# Altium PCB Gandhvedhh.U.K.PcbDoc (part 1 of 2)
Units mil, origin at the board's own origin, x right, y up, seen from the top; angles counter-clockwise.
Board outline 3028 x 3031 mil, 2 copper layers (Top Layer, Bottom Layer); 133 components, 67 nets, 381 pads, 112 vias.
Unrouted connection lines stored in the file: 94.
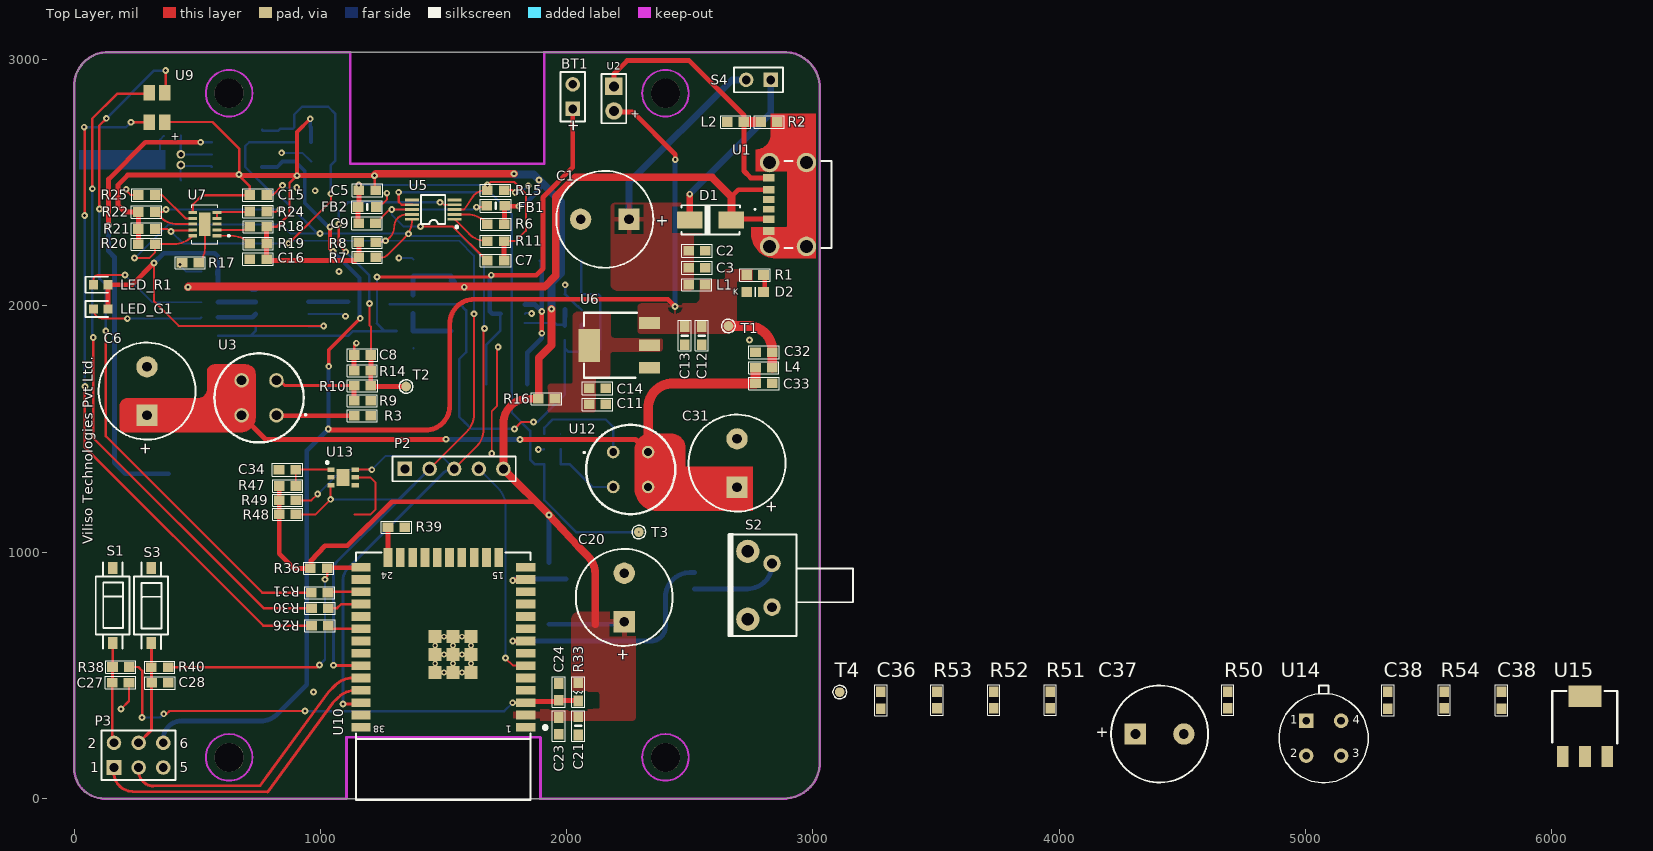
[diagram p0: Top Layer view]
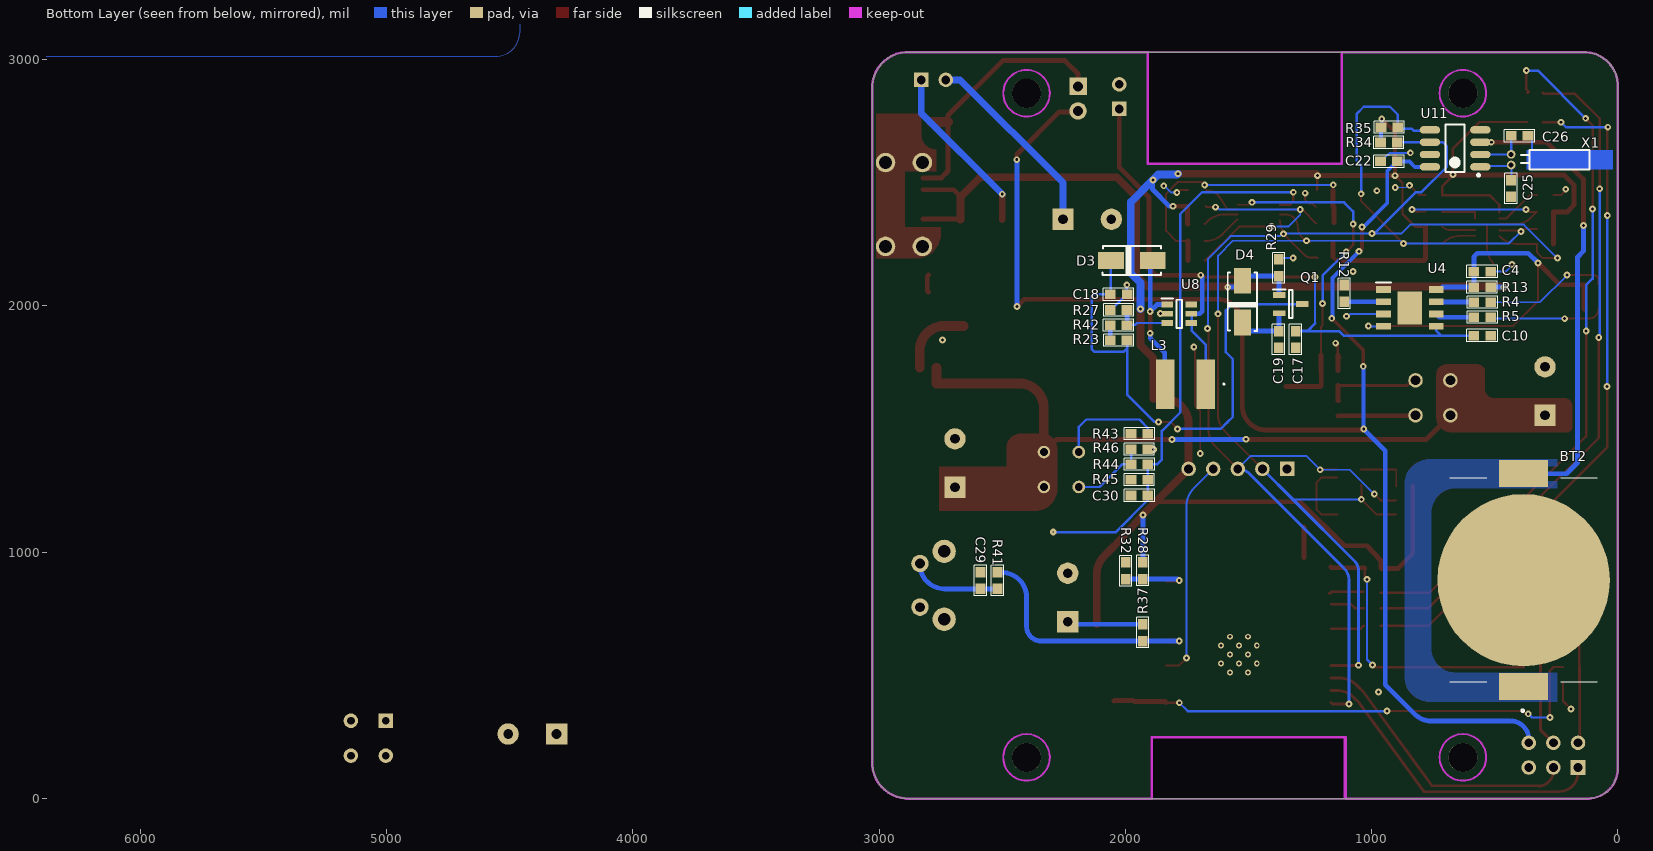
[diagram p1: Bottom Layer view, seen from below]

## Layer stack, top to bottom
Top Solder: solder mask 0.4, Solder Resist, Dk 3.5
Top Layer: signal copper 1.4
Dielectric 1: dielectric 12.6, FR-4, Dk 4.8
Bottom Layer: signal copper 1.4
Bottom Solder: solder mask 0.4, Solder Resist, Dk 3.5

## Board outline
2882.98,3030.97 cw(c2882.98,2885.98) 3027.97,2885.97 3027.97,145.97 cw(c2881.98,145.97) 2881.97,-0.03 122.97,-0.03 cw(c122.97,122.97) -0.03,122.97 -0.03,2892.97 cw(c137.97,2892.97) 137.97,3030.97
cut-out: 1110.97,-0.03 1110.97,248.97 1896.97,248.97 1896.97,-0.03
cut-out: 1121.71,3030.97 1909.11,3030.97 1909.11,2578.4 1121.71,2578.4

## Design rules (kind name [scope] priority, off if disabled: settings)
AssemblyTestpoint [All] p1: testpointundercomponent=FALSE minsize=40 maxsize=100 preferedsize=60 minholesize=0 maxholesize=40 preferedholesize=32.01 testpointgrid=0.98 usegrid=TRUE gridtolerance=0.01 allowsidetop=TRUE allowsidebottom=TRUE
Clearance Clearance_4 [All vs InComponent('X1')] p1: gap=5.91 ignorepadtopadclearanceinfootprint=FALSE
Clearance Clearance_3 [All vs InPolygon] p2: gap=19.68 ignorepadtopadclearanceinfootprint=FALSE
Clearance Clearance_2 [All vs InComponent('U1')] p3: gap=3.94 ignorepadtopadclearanceinfootprint=FALSE
Clearance Clearance_1 [All vs InComponent('U10')OR InComponent('U7')OR InComponent('U5')OR InComponent('U13')] p4: gap=7.87 ignorepadtopadclearanceinfootprint=FALSE
Clearance [All] p5: gap=8 ignorepadtopadclearanceinfootprint=FALSE
DiffPairsRouting [All] p1: maxlimit=10 minlimit=6 mostfreqgap=6 toplayer_minwidth=0.38 toplayer_maxwidth=0.38 toplayer_prefwidth=0.38 bottomlayer_minwidth=0.38 bottomlayer_maxwidth=0.38 bottomlayer_prefwidth=0.38 maxuncoupledlength=500
FabricationTestpoint [All] p1: side=3 testpointundercomponent=TRUE minsize=40 maxsize=100 preferedsize=60 minholesize=0 maxholesize=40 preferedholesize=32.01 testpointgrid=0.98 allowsidetop=TRUE allowsidebottom=TRUE usegrid=TRUE gridtolerance=0.01
HoleSize [All] p1: absolutevalues=TRUE maxlimit=393.7 minlimit=0.98 maxpercent=80.000 minpercent=20.000
HoleToHoleClearance [All] p1: gap=20 allowstackedmicrovias=TRUE
PolygonConnect [All] p1: thpad.connectstyle=Relief thpad.reliefconductorwidth=19.68 thpad.reliefentries=4 thpad.polygonreliefangle="90 Angle" thpad.airgapwidth=15 smdpad.connectstyle=Direct smdpad.reliefconductorwidth=10 smdpad.reliefentries=4 smdpad.polygonreliefangle="90 Angle" smdpad.airgapwidth=10 via.connectstyle=Relief via.reliefconductorwidth=10 via.reliefentries=4 via.polygonreliefangle="90 Angle" via.airgapwidth=15
RoutingVias [All] p1: holewidth=11.81 width=27.56 viastyle="Through Hole" minholewidth=3.94 minwidth=15.75 maxholewidth=11.81 maxwidth=27.56
SilkToSilkClearance [All] p1: silktosilkclearance=3.94
SolderMaskExpansion [All] p1: expansion=4 istentingtop=FALSE
Width [All] p1: maxlimit=78.74 minlimit=5 preferedwidth=7.87
24 further rules are at their usual default settings.

## Components (designator, comment, footprint, x,y, rotation, side; value= is the part's Value field where it differs from the comment)
BT1 "Battery" BAT-2 2024.97,2849.97 r90 top
BT2 "Battery" MPD_BK-912-TR 382.97,886.49 r90 bottom
C1 "470UF" "C16, C49, C58" 2155.17,2352.02 r180 top locked
C2 "10uF" C0603 2529.19,2224.07 r0 top
C3 "0.1UF" C0603 2529.19,2155.17 r0 top
C4 "10uF" C0603 550.84,2139.61 r0 bottom
C5 "1µF" C0603 1190.6,2470.13 r0 top
C6 "470uF/16V" "C16, C49, C58" 295.97,1654.4 r90 top locked
C7 "1µF" C0603 1712.26,2184.7 r0 top
C8 "0.1µF" C0603 1170.92,1800.84 r0 top
C9 "10µF" C0603 1189.97,2335.97 r180 top
C10 "10uF" C0603 550.84,1879.58 r0 bottom
C11 "10µF" C0603 2125.64,1600.62 r180 top
C12 "0.1µF" "0603 Capacitor" 2548.87,1879.58 r270 top
C13 "10µF" "0603 Capacitor" 2479.97,1879.58 r270 top
C14 "10µF" C0603 2125.64,1665.75 r0 top
C15 "0.1µF" C0603 747.69,2450.45 r0 top
C16 "10µF" C0603 747.69,2190.42 r0 top
C17 "22uF" C0603 1308.71,1863.67 r90 bottom
C18 "22uF" C0603 2027.22,2046.9 r0 bottom
C19 "0.1uF" C0603 1377.61,1863.67 r90 bottom
C20 "470UF" "C16, C49, C58" 2233.91,816.59 r90 top locked
C21 "0.1µF" "0603 Capacitor" 2046.9,294.94 r90 top
C22 "1µF" C0603 929.97,2586.97 r180 bottom
C23 "10µF" C0603 1968.16,294.94 r90 top
C24 "0.1µF" C0603 1968.16,432.9 r270 top
C25 "0.1µF" C0603 433.97,2476.74 r90 bottom
C26 "0.1µF" C0603 398.97,2690.97 r0 bottom
C27 "1nF" C0603 188.97,470.8 r180 top
C28 "1nF" C0603 348.97,469.8 r180 top
C29 "1nF" C0603 2588.24,885.49 r270 bottom
C30 "0.1µF" C0603 1942.97,1230.38 r180 bottom
C31 "470uF/16V" "C16, C49, C58" 2691.97,1361.97 r90 top locked
C32 "0.1µF" C0603 2801,1811.97 r0 top
C33 "0.1µF" C0603 2800.97,1685.62 r180 top
C34 "1µF" C0603 865.97,1334.97 r180 top
C36 "0.1µF" C0603 3275.97,398.97 r90 top
C37 "470uF/16V" "C16, C49, C58" 4407.97,261.97 r0 top
C38 "10µF" C0603 5795.97,398.97 r90 top
C38 "10µF" C0603 5334.97,398.97 r90 top
D1 "DIODE" D1 2584.3,2350.05 r180 top
D2 "LED_GREEN" "D2              L0603" 2765.41,2056.75 r180 top
D3 "SS34FA" D1 1974.07,2184.7 r0 bottom
D4 "B5819WS-TP" D1 1525.25,2017.38 r270 bottom
FB1 "FB 1uH" "0603 Capacitor" 1712.26,2406.55 r0 top
FB2 "FB 1uH" "0603 Capacitor" 1189.97,2401.97 r0 top
L1 "1uH" "L3, L4, L5, L6, L7" 2529.19,2086.27 r0 top
L2 "1uH" "L3, L4, L5, L6, L7" 2685.97,2746.97 r180 top
L3 "VLS6045EX-220M-CA" VLS6045 1755.56,1682.73 r0 bottom
L4 "1uH" "L3, L4, L5, L6, L7" 2800.97,1748.8 r180 top
LED_G1 "150060GS55040" LEDC1608X50N 107.93,1987.85 r0 top
LED_R1 "150060GS55040" LEDC1608X50N 107.93,2086.27 r0 top
P2 "Header 5" HDR1X5 1343.36,1338.24 r0 top
P3 "Header 3X2" HDR2X3 161.97,125.97 r0 top
Q1 "RQ5E030RPTL" SOT95P280X100-3N 1328.4,2007.53 r180 bottom
R1 "10K" R0603 2765.41,2125.64 r0 top
R2 "0E" R0603 2821.97,2746.97 r180 top
R3 "DNP" R0603 1170.92,1554 r0 top
R4 "1K" R0603 550.84,2015.21 r0 bottom
R5 "1K" R0603 550.84,1953.99 r0 bottom
R6 "10K" R0603 1712.26,2332.34 r180 top
R7 "10K" R0603 1190.6,2197.69 r0 top
R8 "10K" R0603 1190.6,2258.91 r0 top
R9 "1K" R0603 1170.92,1615.22 r0 top
R10 "1K" R0603 1170.92,1676.44 r180 top
R11 "10K" R0603 1712.26,2263.44 r0 top
R12 "10K" R0603 1111.86,2051.38 r90 bottom
R13 "470R" R0603 550.84,2076.43 r180 bottom
R14 "2K" R0603 1170.92,1737.67 r0 top
R15 "DNP" R0603 1712.26,2470.13 r0 top
R16 "0E" R0603 1918.95,1623.68 r0 top
R17 "DNP" R0603 472.1,2174.86 r0 top
R18 "4.7K" R0603 747.69,2322.49 r180 top
R19 "4.7K" R0603 747.69,2253.6 r180 top
R20 "4.7K" R0603 294.93,2251.43 r0 top
R21 "4.7K" R0603 294.93,2312.65 r0 top
R22 "100K" R0603 294.93,2381.55 r0 top
R23 "4.7K" R0603 2027.22,1861.28 r0 bottom
R24 "10K" R0603 747.69,2383.72 r0 top
R25 "10K" R0603 294.93,2450.45 r180 top
R26 "1.69K" R0603 997.97,701.97 r180 top
R27 "2.2K" R0603 2027.22,1983.73 r0 bottom
R28 "10K/ NTC" R0603 1928.79,924.86 r270 bottom
R29 "100K" R0603 1377.61,2155.17 r90 bottom
R30 "1.69K" R0603 997.97,772.97 r180 top
R31 "1.69K" R0603 996.97,835.97 r180 top
R32 "10K" R0603 1997.69,924.86 r90 bottom
R33 "10K" R_0603_W 2046.9,432.89 r270 top
R34 "10K/DNP/TX" R0603 929.97,2663.97 r180 bottom
R35 "10K/DNP/TX" R0603 927.97,2725.2 r180 bottom
R36 "10K" R0603 993.75,934.7 r0 top
R37 "10K" R0603 1928.79,673.42 r270 bottom
R38 "470E" R0603 189.97,533.97 r0 top
R39 "10K/DNP" R0603 1308.71,1102.02 r180 top
R40 "470E" R0603 347.97,532.97 r0 top
R41 "470E" R0603 2519.34,885.49 r90 bottom
R42 "12K" R0603 2027.22,1922.51 r180 bottom
R43 "DNP" R0603 1942.97,1480.78 r0 bottom
R44 "1K" R0603 1942.97,1356.97 r0 bottom
R45 "2K" R0603 1942.97,1294.97 r180 bottom
R46 "1K" R0603 1942.97,1418.78 r180 bottom
R47 "0R/DNP" R0603 866.97,1268.97 r180 top
R48 "10K/DNP" R0603 866.97,1153.97 r180 top
R49 "10K/DNP" R0603 866.97,1210.97 r180 top
R50 "0E" R0603 4684.97,399.97 r90 top
R51 "1K" R0603 3963.97,399.97 r90 top
R52 "1K" R0603 3733.97,399.97 r90 top
R53 "2K" R0603 3503.97,399.97 r90 top
R54 "0E" R0603 5563.97,399.97 r90 top
S1 "SW-PB" "S2, S3" 156.97,783.97 r90 top
S2 "SW-SPST" S1 2785.09,865.8 r270 top locked
S3 "SW-PB" "S2, S3" 313,783.44 r90 top
S4 "Header 2" HDR1X2 2828.97,2917.97 r180 top
T1 "TEST POINT" TP 2657.14,1918.95 r0 top
T2 "TEST POINT" TP 1348.08,1672.89 r0 top
T3 "TEST POINT" TP 2292.97,1081.97 r0 top
T4 "TEST POINT" TP 3108.97,431.97 r0 top
U1 "217175-0001" 2171750001 2940.27,2412.24 r90 top locked
U2 "RST_CON_BERG_2.54MM" U23 2191.97,2841.97 r0 top
U3 "TGS2602" TGS2602#1 750.97,1626.97 r0 top locked
U4 "TP4056" SOIC127P600X175-9N 844.62,1992.38 r180 bottom
U5 "ADS1115IDGSR-msop" "U19, U20" 1458.32,2391.39 r180 top locked
U6 "LM1117" "U1, U24              SOT-223" 2214.23,1840.21 r90 top locked
U7 "CCS811B-JOPR5KCT" *SON60P400X270X110-11N 531.16,2332.34 r180 top
U8 "MT3608" SOT95P280X145-6N 1781.16,1968.16 r180 bottom
U9 "RGB_LED" WL-SFCW_1206 335.97,2805.97 r90 top locked
U10 "ESP_32" "U20             ESP 32 - duplicate" 1499.66,634.11 r180 top locked
U11 "DS1307Z" "U6, U8                    SOIC-8N" 660.97,2639.97 r0 bottom
U12 "TGS2603" TGS2602#2 2259.97,1335.97 r180 top locked
U13 "SGP40-D-R4" SON80P244X244X95-7N 1091.97,1303.97 r0 top
U14 "TGS2603" U4 5073.97,244.97 r0 top
U15 "LM1117S-1.8" "U1, U24              SOT-223" 6134.97,292.97 r0 top
X1 "32.768kHz" XTAL 433.61,2594.1 r270 bottom

## Footprints (in the part's own frame and the unit in brackets; to place one, negate y for a bottom-side part, rotate by r counter-clockwise, add the part's x,y. Pads: shape width x height; smd on the part's side, far side on the other; paste and mask are expansions set on the pad)
"0603 Capacitor" [mil]
  rect 43x39 smd: 1(-37,0) 2(37,0)
  silkscreen extent -62,-26 62,26, body extent -31,-16 32,16, height 32
2171750001 [mm]
  rect 0.7x1.2 smd: A5(-0.5,3.03) B5(0.5,3.03)
  rect 0.76x1.2 smd: A9(1.52,3.03) B9(-1.52,3.03)
  rect 0.8x1.2 smd: A12(2.75,3.03) B12(-2.75,3.03)
  round 2.01 hole 1.34: MH1(-4.32,-0.85) MH2(4.32,-0.85) MH3(-4.32,2.95) MH4(4.32,2.95)
  silkscreen extent -4.47,-3.45 4.47,4.5, body extent -4.47,-3.36 4.47,3.54, height 3.23
*SON60P400X270X110-11N [mm]
  rect 0.91x0.32 smd: 1(-1.255,1.2) 2(-1.255,0.6) 3(-1.255,0) 4(-1.255,-0.6) 5(-1.255,-1.2) 6(1.255,-1.2) 7(1.255,-0.6) 8(1.255,0) 9(1.255,0.6) 10(1.255,1.2)
  rect 1.2x2.4 smd: 11(0,0)
  silkscreen extent -2.57,-2 1.35,2, body extent -1.35,-2 1.35,2, height 1.1
BAT-2 [mm] "Battery; 2 Leads"
  rect 1.5x1.5 hole 0.9: 1(-1.27,0)
  round 1.5 hole 0.9: 2(1.27,0)
  silkscreen extent -2.54,-1.27 2.54,1.27
"C16, C49, C58" [mm]
  rect 2.2x2.2 hole 1: 1(-2.5,0)
  round 2.2 hole 1: 2(2.5,0)
  silkscreen extent -5,-5 5,5
C0603 [mil]
  rect 43x39 smd: 1(-34.03,0) 2(34.03,0)
  silkscreen extent -62,-26 62,26, body extent -31,-16 31,16, height 12
D1 [mm]
  rect 2.65x1.75 smd: 1(2.15,0) 2(-2.15,0)
  silkscreen extent -3.02,-1.5 3,1.5, body extent -2.75,-1.4 2.75,1.4, height 2.6
"D2              L0603" [mil]
  rect 43x39 smd: 1(-34,0) 2(34,0)
  silkscreen extent 0,-20 0,20, body extent -32,-16 31,16, height 24
HDR1X2 [mm] "Connector; Header; 2 Position"
  rect 1.5x1.5 hole 0.9: 1(0,0)
  round 1.5 hole 0.9: 2(2.54,0)
  silkscreen extent -1.27,-1.27 3.81,1.27
HDR1X5 [mm] "Connector; Header; 5 Position"
  rect 1.5x1.5 hole 0.9: 1(0,0)
  round 1.5 hole 0.9: 2(2.54,0) 3(5.08,0) 4(7.62,0) 5(10.16,0)
  silkscreen extent -1.27,-1.27 11.43,1.27
HDR2X3 [mm] "Connector; Header; 3x2 Position"
  rect 1.5x1.5 hole 0.9: 1(0,0)
  round 1.5 hole 0.9: 2(0,2.54) 3(2.54,0) 4(2.54,2.54) 5(5.08,0) 6(5.08,2.54)
  silkscreen extent -1.27,-1.27 6.35,3.81
"L3, L4, L5, L6, L7" [mil] "R0603"
  rect 43x39 smd: 1(-34,0) 2(34,0)
  silkscreen extent -61,-25 61,25, body extent -33,-16 33,16, height 22
LEDC1608X50N [mm]
  rect 0.9x0.95 smd: 1(-0.75,0) 2(0.75,0)
  silkscreen extent -1.55,-0.82 0.75,0.82
MPD_BK-912-TR [mm]
  rect 2.79x5.08 smd: 1(-10.985,0) 1(10.985,0)
  round 17.78 smd: 2(0,0)
  silkscreen extent -13.59,-7.62 10.54,7.62, body extent -11.48,-7.67 11.38,7.74, height 4.3
R0603 [mil] "R0603"
  rect 43x39 smd: 1(-34,0) 2(34,0)
  silkscreen extent -62,-25 61,25, body extent -33,-16 33,16, height 22
R_0603_W [mil] "Chip Resistor, 2-Leads, Body 1.60x0.80mm, IPC Medium Density"
  rect 43x39 smd: 1(-37,0) 2(37,0)
  silkscreen extent -62,-26 62,26, body extent -30,-15 32,16, height 18
S1 [mm]
  round 1.8 hole 1: 1(-2.25,1.25) 2(2.25,1.25)
  round 2.4 hole 1.3: ""(-3.5,-1.25) ""(3.5,-1.25)
  silkscreen extent -5.38,-3.25 5.32,9.6
"S2, S3" [mm]
  rect 1.25x1 smd: 1(-3.875,0) 2(3.875,0)
  silkscreen extent -4.46,-1.75 4.45,1.75
SOIC127P600X175-9N [mm]
  rect 1.525x0.7 smd: 1(-2.712,1.905) 2(-2.712,0.635) 3(-2.712,-0.635) 4(-2.712,-1.905) 5(2.712,-1.905) 6(2.712,-0.635) 7(2.712,0.635) 8(2.712,1.905)
  rect 2.513x3.402 smd: 9(0,0)
  silkscreen extent -3.47,2.6 -1.95,2.6, body extent -3,-2.45 3,2.45, height 1.75
SON80P244X244X95-7N [mm]
  rect 0.75x0.45 smd: 1(-1.25,0.8) 2(-1.25,0) 3(-1.25,-0.8) 4(1.25,-0.8) 5(1.25,0) 6(1.25,0.8)
  rect 1.35x1.74 smd: 7(0,0)
  silkscreen extent -1.75,1.4 -1.5,1.65, body extent -1.27,-1.22 1.27,1.22, height 0.95
SOT95P280X100-3N [mm]
  rect 1.3x0.6 smd: 1(-1.2,0.95) 2(-1.2,-0.95) 3(1.2,0)
  silkscreen extent -1.85,-1.45 0.2,1.5, body extent -1.4,-1.45 1.4,1.45, height 1
SOT95P280X145-6N [mm]
  rect 1.2x0.6 smd: 1(-1.25,0.95) 2(-1.25,0) 3(-1.25,-0.95) 4(1.25,-0.95) 5(1.25,0) 6(1.25,0.95)
  silkscreen extent -1.85,-1.45 0.3,1.6, body extent -1.4,-1.45 1.4,1.45, height 1.45
TGS2602#1 [mm]
  round 1.5 hole 1: 1(1.8,-1.8) 2(1.8,1.8) 3(-1.8,1.8) 4(-1.8,-1.8)
  silkscreen extent -4.6,-4.6 4.85,4.6, body extent -4.6,-4.6 4.6,4.6, height 8
TGS2602#2 [mm]
  round 1.3 hole 0.8: 1(1.8,-1.8) 2(1.8,1.8) 3(-1.8,1.8) 4(-1.8,-1.8)
  silkscreen extent -4.6,-4.6 4.85,4.6, body extent -4.6,-4.6 4.6,4.6, height 8
TP [mm]
  round 1 smd paste-1 mask+0.102: 1(0,0)
  silkscreen extent -0.7,-0.7 0.7,0.7
"U1, U24              SOT-223" [mm]
  rect 1.2x2.2 smd: 1(-2.3,-3.1) 2(0,-3.1) 3(2.3,-3.1)
  rect 3.4x2.2 smd: 4(0,3.1)
  silkscreen extent -3.35,-1.77 3.35,3.65, body extent -3.26,-3.47 3.24,3.49, height 1.9
U4 [mm]
  rect 1.5x1.5 hole 0.8: 1(-1.8,1.8)
  round 1.5 hole 0.8: 2(-1.8,-1.8) 3(1.8,-1.8) 4(1.8,1.8)
  silkscreen extent -4.6,-4.6 4.6,5.43
"U6, U8                    SOIC-8N" [mil]
  oval 82.68x30 smd: 1(-102.36,75) 2(-102.36,25) 3(-102.36,-25) 4(-102.36,-75) 5(102.36,-75) 6(102.36,-25) 7(102.36,25) 8(102.36,75)
  silkscreen extent -100,-96 38,114, body extent -118,-96 118,96, height 67
"U19, U20" [mm]
  rect 1.45x0.3 smd mask+0.08: 1(-2.2,1) 2(-2.2,0.5) 3(-2.2,0) 4(-2.2,-0.5) 5(-2.2,-1) 6(2.2,-1) 7(2.2,-0.5) 8(2.2,0) 9(2.2,0.5) 10(2.2,1)
  silkscreen extent -2.55,-1.5 1.25,1.9
"U20             ESP 32 - duplicate" [mm]
  rect 2x0.9 smd: 1(-8.5,8.755) 2(-8.5,7.485) 3(-8.5,6.215) 4(-8.5,4.945) 5(-8.5,3.675) 6(-8.5,2.405) 7(-8.5,1.135) 8(-8.5,-0.135) 9(-8.5,-1.405) 10(-8.5,-2.675) 11(-8.5,-3.945) 12(-8.5,-5.215) 13(-8.5,-6.485) 14(-8.5,-7.755) 25(8.5,-7.755) 26(8.5,-6.485) 27(8.5,-5.215) 28(8.5,-3.945) 29(8.5,-2.675) 30(8.5,-1.405) 31(8.5,-0.135) 32(8.5,1.135) 33(8.5,2.405) 34(8.5,3.675) 35(8.5,4.945) 36(8.5,6.215) 37(8.5,7.485) 38(8.5,8.755)
  rect 0.9x2 smd: 15(-5.715,-8.755) 16(-4.445,-8.755) 17(-3.175,-8.755) 18(-1.905,-8.755) 19(-0.635,-8.755) 20(0.635,-8.755) 21(1.905,-8.755) 22(3.175,-8.755) 23(4.445,-8.755) 24(5.715,-8.755)
  rect 1.33x1.33 smd: 39(-2.85,3.115) 39(-2.85,-0.585) 39(-2.85,1.265) 39(-1,3.115) 39(-1,1.265) 39(-1,-0.585) 39(0.85,3.115) 39(0.85,1.265) 39(0.85,-0.585)
  silkscreen extent -10.6,-9.26 9,16.26, body extent -9.06,-9.29 9.01,16.25, height 3.2
U23 [mm]
  rect 1.8x1.8 hole 1.02: 1(0,1.27)
  round 1.8 hole 1.02: 2(0,-1.27)
  silkscreen extent -1.27,-2.54 1.27,2.54
VLS6045 [mm]
  rect 1.9x5.1 smd: 1(-2.1,0) 2(2.1,0)
  silkscreen extent -4,-0.05 -3.9,0.05
WL-SFCW_1206 [mm] "SMT Full-color Chip LED Waterclear, body 3.2x1.6mm"
  rect 1.6x1.2 smd: 1(-1.5,0.8) 2(-1.5,-0.8) 3(1.5,-0.8) 4(1.5,0.8)
  body extent -1.6,-0.8 1.6,0.8, height 0.7
XTAL [mm]
  round 0.9 hole 0.5: 1(0.55,0) 2(-0.55,0)
  silkscreen extent -1,1.02 1,8.09

## Part data
BT1 BT2: "Multicell Battery", LatestRevisionDate=17-Jul-2002, LatestRevisionNote="Re-released for DXP Platform.", PackageDescription="Battery; 2 Leads", PackageReference=BAT-2, Published=24-Mar-1999, Publisher="Altium Limited"
C1 C6 C20 C31 C37: library part CAP, "CAP ALUM 470UF 20% 50V RADIAL", Part Number=871-B41896E6477M000
C2 C3: library part "CAP NP", "CAP CER 22UF 10V X5R 0603", Part Number=GRM188R61A226ME15D
C4 C10 C17 C18 C19: library part CAP_C_0.1µF/16V, "CAP CER SMD 0.1µF/16V", Capacitance=1nF, MANUFACTURER="Murata Electronics North America", Manufacturer Part Number=GRM155R61H104KE19D, Operating Temperature="-55°C ~ 85°C", Ratings=-, Supplier Part Number 1=490-11917-1-ND, Temperature Coefficient=X5R, Tolerance=±10%, Voltage - Rated=16V, Applications="General Purpose", Category=Capacitors, ComponentLink1Description=http://www.murata.com/~/media/webrenewal/support/library/catalog/products/capacitor/mlcc/c02e.ashx, ComponentLink1URL=http://www.murata.com/~/media/webrenewal/support/library/catalog/products/capacitor/mlcc/c02e.ashx, Features=-, Height - Seated (Max)=-, Lead Spacing=-, Lead Style=-, Mounting Type="Surface Mount, MLCC", Packaging="Cut Tape (CT)", Part Status=Active, Pricing 1="1=0.1, 10=0.062, 25=0.0456, 50=0.034, 100=0.0278, 250=0.02328, 500=0.01988, 1000=0.01562, 5000=0.01307 (USD)", ROHS="RoHS Compliant", Size / Dimension="0.039\" L x 0.020\" W (1.00mm x 0.50mm)", Stock 1=958509, Supplier 1=Digi-Key, Thickness (Max)="0.022\" (0.55mm)"
C5 C8 C21 C24 C27 C28 C29 C30 C32 C33 C36: library part CAP_C_0.1µF/16V, "CAP CER SMD 0.1µF/16V", MANUFACTURER="Murata Electronics North America", Manufacturer Part Number=GRM155R61H104KE19D, Operating Temperature="-55°C ~ 85°C", Package / Case="0402 (1005 Metric)", Ratings=-, Supplier Part Number 1=490-11917-1-ND, Temperature Coefficient=X5R, Tolerance=±10%, Voltage - Rated=16V, Applications="General Purpose", Category=Capacitors, ComponentLink1Description=http://www.murata.com/~/media/webrenewal/support/library/catalog/products/capacitor/mlcc/c02e.ashx, ComponentLink1URL=http://www.murata.com/~/media/webrenewal/support/library/catalog/products/capacitor/mlcc/c02e.ashx, Features=-, Height - Seated (Max)=-, Lead Spacing=-, Lead Style=-, Mounting Type="Surface Mount, MLCC", Packaging="Cut Tape (CT)", Part Status=Active, Pricing 1="1=0.1, 10=0.062, 25=0.0456, 50=0.034, 100=0.0278, 250=0.02328, 500=0.01988, 1000=0.01562, 5000=0.01307 (USD)", ROHS="RoHS Compliant", Size / Dimension="0.039\" L x 0.020\" W (1.00mm x 0.50mm)", Stock 1=958509, Supplier 1=Digi-Key, Thickness (Max)="0.022\" (0.55mm)"
  C5: Capacitance=1µF
  C8 C21 C24 C30 C32 C33 C36: Capacitance=0.1µF
  C27 C28 C29: Capacitance=1nF
C7 C12 C15 C22 C25 C26 C34: library part CAP_C_0.1µF/50V, "CAP CER SMD 0.1µF/50V", MANUFACTURER=Yageo, Manufacturer Part Number=CC0805ZRY5V9BB104, Operating Temperature="-30°C ~ 85°C", Package / Case="0805 (2012 Metric)", Ratings=-, Supplier Part Number 1=311-1361-1-ND, Temperature Coefficient="Y5V (F)", Tolerance="-20%, +80%", Voltage - Rated=50V, Applications="General Purpose", Category=Capacitors, ComponentLink1Description=http://www.yageo.com/documents/recent/UPY-GPHC_Y5V_6.3V-to-50V_8.pdf, ComponentLink1URL=http://www.yageo.com/documents/recent/UPY-GPHC_Y5V_6.3V-to-50V_8.pdf, Failure Rate=-, Features=-, Height - Seated (Max)=-, Lead Spacing=-, Lead Style=-, Mounting Type="Surface Mount, MLCC", Packaging="Cut Tape (CT)", Part Status=Active, Pricing 1="1=0.1, 10=0.036, 25=0.0264, 50=0.0198, 100=0.0162, 250=0.01352, 500=0.01156, 1000=0.00908 (USD)", ROHS="RoHS Compliant", Size / Dimension="0.079\" L x 0.049\" W (2.00mm x 1.25mm)", Stock 1=934185, Supplier 1=Digi-Key, Thickness (Max)="0.024\" (0.60mm)"
  C7 C22 C34: Capacitance=1µF
  C12 C15 C25 C26: Capacitance=0.1µF
C9 C11 C13 C14 C38 C38: library part CAP_C_10µF/35V, "CAP CER SMD 10µF/35V", MANUFACTURER="Taiyo Yuden", Manufacturer Part Number=GMK316AB7106KL-TR, Operating Temperature="-55°C ~ 125°C", Package / Case="1206 (3216 Metric)", Ratings=-, Supplier Part Number 1=587-3007-1-ND, Temperature Coefficient=X7R, Tolerance=±10%, Voltage - Rated=35V, Applications="General Purpose", Capacitance=10µF, Category=Capacitors, ComponentLink1Description=http://www.yuden.co.jp/productdata/catalog/en/mlcc06_e.pdf, ComponentLink1URL=http://www.yuden.co.jp/productdata/catalog/en/mlcc06_e.pdf, Features=-, Height - Seated (Max)=-, Lead Spacing=-, Lead Style=-, Mounting Type="Surface Mount, MLCC", Packaging="Cut Tape (CT)", Part Status=Active, Pricing 1="1=0.51, 10=0.362, 25=0.3092, 50=0.274, 100=0.2387, 250=0.20328, 500=0.17678, 1000=0.15026 (USD)", ROHS="RoHS Compliant", Size / Dimension="0.126\" L x 0.063\" W (3.20mm x 1.60mm)", Stock 1=533940, Supplier 1=Digi-Key, Thickness (Max)="0.071\" (1.80mm)"
C16 C23: library part CAP_C_10µF/10V, "CAP CER SMD 10µF/10V", MANUFACTURER=Yageo, Manufacturer Part Number=CC0805ZKY5V6BB106, Operating Temperature="-30°C ~ 85°C", Package / Case="0805 (2012 Metric)", Ratings=-, Supplier Part Number 1=311-1355-1-ND, Temperature Coefficient="Y5V (F)", Tolerance="-20%, +80%", Voltage - Rated=10V, Applications="General Purpose", Capacitance=10µF, Category=Capacitors, ComponentLink1Description=http://www.yageo.com/documents/recent/UPY-GPHC_Y5V_6.3V-to-50V_8.pdf, ComponentLink1URL=http://www.yageo.com/documents/recent/UPY-GPHC_Y5V_6.3V-to-50V_8.pdf, Failure Rate=-, Features=-, Height - Seated (Max)=-, Lead Spacing=-, Lead Style=-, Mounting Type="Surface Mount, MLCC", Packaging="Cut Tape (CT)", Part Status=Active, Pricing 1="1=0.18, 10=0.131, 25=0.0956, 50=0.0742, 100=0.0615, 250=0.05088, 500=0.04312, 1000=0.03569 (USD)", ROHS="RoHS Compliant", Size / Dimension="0.079\" L x 0.049\" W (2.00mm x 1.25mm)", Stock 1=595702, Supplier 1=Digi-Key, Thickness (Max)="0.049\" (1.25mm)"
D1: "DIODE GEN PURP 1KV 1A DO214AC", Part Number=641-1018-2-ND
D2: library part LED, "LED GREEN CLEAR THIN 0603 SMD", Distributor Part Number=160-1443-1-ND, Manufacturer Part Number=160-1443-2-ND, PACKAGE=0603, Supplier Part Number 1=LTL-1CHG-BAG, Part Number=160-1443-2-ND, Supplier 1="Future Electronics", Type=Diode
D3: "Schottky Diode", Manufacturer_Name="ON Semiconductor", Mouser Part Number=512-SS34FA, Arrow Part Number=SS34FA, Arrow Price/Stock=https://www.arrow.com/en/products/ss34fa/on-semiconductor?region=nac, Datasheet Link=http://www.onsemi.com/pub/Collateral/SS36FA-D.pdf, Height=1.43mm, Manufacturer_Part_Number=SS34FA, Mouser Price/Stock=https://www.mouser.co.uk/ProductDetail/ON-Semiconductor-Fairchild/SS34FA?qs=R26iFe%2FkX%2FK1QUwZdCmBBw%3D%3D
D4: "Diode", Manufacturer_Name="Micro Commercial Components (MCC)", Mouser Part Number=833-B5819WS-TP, Arrow Part Number=B5819WS-TP, Arrow Price/Stock=https://www.arrow.com/en/products/b5819ws-tp/micro-commercial-components?region=asia, Datasheet Link=https://www.arrow.com/en/products/b5819ws-tp/micro-commercial-components, Height=1.15mm, Manufacturer_Part_Number=B5819WS-TP, Mouser Price/Stock=https://www.mouser.co.uk/ProductDetail/Micro-Commercial-Components-MCC/B5819WS-TP?qs=SdqRYZZ9IxBOLbXcW6zYBA%3D%3D
FB1 FB2: library part INDUCTOR, "FILTER CHIP 120 OHM 3A 0603", Distributor Part Number=MMZ2012Y152B, PACKAGE=0603, Manufacturer Part Number=MMZ2012Y152B, Part Number=MMZ2012Y152B, Type=Ferrite
L1 L2 L4: library part INDUCTOR, "FERRITE BEAD 120 OHM 0603 1LN", Part Number=490-3996-1-ND, Supplier Part Number 1=BLM18SG121TN1D, Supplier 1=Arrow
L3: "Inductor", Manufacturer_Name=TDK, Mouser Part Number=810-VLS6045EX220MCA, Arrow Part Number=VLS6045EX-220M-CA, Arrow Price/Stock=https://www.arrow.com/en/products/vls6045ex-220m-ca/tdk, Datasheet Link=https://product.tdk.com/system/files/dam/doc/product/inductor/inductor/smd/catalog/inductor_automotive_power_vls6045ex-ca_en.pdf, Manufacturer_Part_Number=VLS6045EX-220M-CA, Mouser Price/Stock=https://www.mouser.com/Search/Refine.aspx?Keyword=810-VLS6045EX220MCA
LED_G1 LED_R1: "LED", Manufacturer_Name="Wurth Elektronik", Mouser Part Number=710-150060GS55040, Datasheet Link=https://katalog.we-online.de/led/datasheet/150060GS55040.pdf, Height=0.5mm, Manufacturer_Part_Number=150060GS55040, Mouser Price/Stock=https://www.mouser.co.uk/ProductDetail/Wurth-Elektronik/150060GS55040?qs=fAHHVMwC%252Bbhr5Aln2oA6Nw%3D%3D
P2: "Header, 5-Pin", LatestRevisionDate=17-Jul-2002, LatestRevisionNote="Re-released for DXP Platform.", Publisher="Altium Limited"
P3: "Header, 3-Pin, Dual row", LatestRevisionDate=17-Jul-2002, LatestRevisionNote="Re-released for DXP Platform.", Publisher="Altium Limited"
Q1: "MOSFET (P-Channel)", Manufacturer_Name="ROHM Semiconductor", Mouser Part Number=755-RQ5E030RPTL, Datasheet Link=https://www.mouser.com/datasheet/2/348/rq5e030rp-e-1596311.pdf, Height=1mm, Manufacturer_Part_Number=RQ5E030RPTL, Mouser Price/Stock=https://www.mouser.com/Search/Refine.aspx?Keyword=755-RQ5E030RPTL
R1 R10 R44 R52: library part R, "RES SMD 1K OHM 5% 1/10W 0603", PACKAGE=0603, Part Number=311-1.0KGRTR-ND, Type=Resistor
R2 R4 R5 R12 R13 R23 R27 R29 R42: library part R, "RES SMD 4.7K OHM 1% 1/16W 0603", Distributor Part Number=1276-3466-2-ND, MANUFACTURER=Samsung, PACKAGE=0603, Part Number=P4.7KDBCT-ND, Rating=1/16W, Tolerance=1%, Distributor=Digikey, Manufacturer Part Number=1276-3466-2-ND, Type=Resistor
R3 R15 R43 R50: library part R, PACKAGE=0603, Type=Resistor
R6 R7 R8 R11: library part R, "RES SMD 4.7K OHM 1% 1/16W 0603", Distributor Part Number=1276-3466-2-ND, MANUFACTURER=Samsung, PACKAGE=0603, Part Number=311-10KGRTR-ND, Rating=1/16W, Tolerance=1%, Distributor=Digikey, Manufacturer Part Number=1276-3466-2-ND, Type=Resistor
R9 R46 R51: library part R, "RES SMD 1K OHM 5% 1/10W 0603", Distributor Part Number=1276-3466-2-ND, MANUFACTURER=Samsung, PACKAGE=0603, Part Number=311-1.0KGRTR-ND, Rating=1/16W, Tolerance=1%, Distributor=Digikey, Manufacturer Part Number=1276-3466-2-ND, Type=Resistor
R14 R45 R53: library part R, "RES SMD 2K OHM 1% 1/10W 0603", PACKAGE=0603, Part Number=YAG1297CT-ND, Type=Resistor
R16 R38 R40 R41 R54: library part R, "RES SMD 470 OHM 1% 1/10W 0603", PACKAGE=0603, Part Number=311-470HRCT-ND, Type=Resistor
R17: library part R
R18 R19 R20 R21: library part R, "P4.7KDBTR-ND", Part Number=P4.7KDBDKR-ND
R22: library part R, "RES SMD 100K OHM 0.1% 1/10W 0603", Part Number=YAG1235TR-ND
R24: library part R, Part Number=594-NTCS402E3103JL1T
R25: library part R, "RES SMD 4.7K OHM 1% 1/16W 0603", Part Number=311-10KGRTR-ND
R26 R30 R31 R32 R33 R34 R35 R36 R37 R39 R47 R48 R49: library part R, "RES SMD 4.7K OHM 1% 1/16W 0603", PACKAGE=0603, Part Number=311-10KGRTR-ND, Type=Resistor
R28: library part R, "THERMISTOR NTC 10KOHM 3380K 0603", PACKAGE=0603, Part Number=490-16279-2-ND, Type=Resistor
S1 S3: "Switch", LatestRevisionDate=17-Jul-2002, LatestRevisionNote="Re-released for DXP Platform.", PackageDescription="Switch; 2 Leads", PackageReference=SPST-2, Published=24-Mar-1999, Publisher="Altium Limited"
S2: "SWITCH TACTILE SPST-NO 0.05A 12V", Part Number=TL1105SF160Q, LatestRevisionDate=17-Jul-2002, LatestRevisionNote="Re-released for DXP Platform.", PackageDescription="Switch; 2 Leads", PackageReference=SPST-2, Published=24-Mar-1999, Publisher="Altium Limited"
S4: "Header, 2-Pin", LatestRevisionDate=17-Jul-2002, LatestRevisionNote="Re-released for DXP Platform.", Publisher="Altium Limited"
T1 T2 T3 T4: library part Test_P
U1: "Connector", Manufacturer_Name=Molex, Mouser Part Number=538-217175-0001, Datasheet Link=https://www.molex.com/pdm_docs/sd/2171750001_sd.pdf, Height=3.46mm, Manufacturer_Part_Number=217175-0001, Mouser Price/Stock=https://www.mouser.co.uk/ProductDetail/Molex/217175-0001?qs=DRkmTr78QARWJMiqNnldSg%3D%3D
U2: library part CON_AC_1, "CONN HEADER VERT 2POS 2.54MM", Part Number=609-4434-ND, Supplier Part Number 1=62K8865, Supplier 1=Newark
U3: library part TGS2602_1, Part Number=TGS2602
U4: "Connector", Manufacturer_Name="NanJing Top Power", Datasheet Link=https://dlnmh9ip6v2uc.cloudfront.net/datasheets/Prototyping/TP4056.pdf, Height=1.75mm, Manufacturer_Part_Number=TP4056
U5: library part ADS1115, "IC ADC 16BIT SIGMA-DELTA 10VSSOP", Part Number=595-ADS1115IDGST
U6: library part TLV70033DDCT, "3.3V LDO", Current - Limit (Min)=220mA, Current - Output=200mA, MANUFACTURER="Texas Instruments", Operating Temperature="-40°C ~ 125°C", Package / Case="SOT-23-5 Thin, TSOT-23-5", Supplier Device Package=SOT-23-5, Supplier Part Number 1=LM1117IMP-3.3/NOPBCT-ND, Voltage - Dropout (Typical)=-, Voltage - Input="Up to 5.5V", Voltage - Output=3.3V, Category="Integrated Circuits (ICs)", ComponentLink1Description=http://www.ti.com/lit/ds/slvsa00e/slvsa00e.pdf, ComponentLink1URL=http://www.ti.com/lit/ds/slvsa00e/slvsa00e.pdf, Manufacturer Part Number=LM1117, Mounting Type="Surface Mount", Packaging="Cut Tape (CT)", Part Status=Active, Pricing 1="1=0.53, 10=0.452, 100=0.3374 (USD)", Regulator Topology="Positive Fixed", ROHS="RoHS Compliant", Stock 1=5021, Supplier 1=Digi-Key
U7: library part CCS811B-JOPR5KCT_3, "CCS811B-JOPR5K LGA10 LF T&R", Part Number=CCS811B-JOPR5KCT-ND
U8: "Undefined or Miscellaneous", Manufacturer_Name=Aerosemi, Datasheet Link=https://www.olimex.com/Products/Breadboarding/BB-PWR-3608/resources/MT3608.pdf, Height=1.45mm, Manufacturer_Part_Number=MT3608
U9: library part RGB_LED_PTH_0, Part Number=754-1492-ND
U10: library part ESP32_SMD_1, "WIFI MODULE 128MBITS SPI FLASH", Part Number=356-ES32WROOM32D16MB
U11: library part MP1584_SOIC_0, "IC REG BUCK ADJUSTABLE 3A 8SOIC", Part Number=1589-1533-1-ND
U12 U14: library part TGS2602_1, Part Number=TGS2602
U13: "Integrated Circuit", Manufacturer_Name=Sensirion, Mouser Part Number=403-SGP40-D-R4, Arrow Part Number=SGP40-D-R4, Arrow Price/Stock=https://www.arrow.com/en/products/sgp40-d-r4/sensirion-ag?region=europe, Datasheet Link=https://www.mouser.com/datasheet/2/682/Sensirion_Gas_Sensors_SGP40_Datasheet-1888696.pdf, Height=0.95mm, Manufacturer_Part_Number=SGP40-D-R4, Mouser Price/Stock=https://www.mouser.co.uk/ProductDetail/Sensirion/SGP40-D-R4?qs=yqaQSyyJnNgaRqiZfsbS1Q%3D%3D
U15: library part TLV70033DDCT, "3.3V LDO", Current - Limit (Min)=220mA, Current - Output=200mA, MANUFACTURER="Texas Instruments", Manufacturer Part Number=LM1117, Operating Temperature="-40°C ~ 125°C", Package / Case="SOT-23-5 Thin, TSOT-23-5", Supplier Device Package=SOT-23-5, Supplier Part Number 1=LM1117IMP-3.3/NOPBCT-ND, Voltage - Dropout (Typical)=-, Voltage - Input="Up to 5.5V", Voltage - Output=3.3V, Category="Integrated Circuits (ICs)", ComponentLink1Description=http://www.ti.com/lit/ds/slvsa00e/slvsa00e.pdf, ComponentLink1URL=http://www.ti.com/lit/ds/slvsa00e/slvsa00e.pdf, Mounting Type="Surface Mount", Packaging="Cut Tape (CT)", Part Status=Active, Pricing 1="1=0.53, 10=0.452, 100=0.3374 (USD)", Regulator Topology="Positive Fixed", ROHS="RoHS Compliant", Stock 1=5021, Supplier 1=Digi-Key
X1: library part XTAL_2-pin, "XTAL SMD 3215, 32.768kHz, Cl=9pF, Total Tol: ±50ppm", Part Number=XTAL_SMD3215_32.768kHz_9pF_General, Artikkelnr Noca=N.A., Artikkelnr Simpro=N.A., Footprint Doc=XTAL_3215, LatestRevisionDate=2016-08-19, Note="XTAL SMD 32.768kHz", Pin Count=2, Published=2016-08-19, Publisher="Nordic Semiconductor"

## Free pads (board coordinates)
  round 118.11 hole 118.11 unplated: 34(629.58,2863.83) 35(2401.23,2863.83) 36(629.58,166.98) 37(2401.23,166.98)

## Via types
v1: diameter 27.56, hole 11.81, Top Layer to Bottom Layer, tented both sides, 99 vias
v2: diameter 23.62, hole 11.81, Top Layer to Bottom Layer, 12 vias
v3: diameter 27.56, hole 0, Top Layer to Bottom Layer, tented both sides, 1 vias

## Nets (pads, with @x,y where several pads share a name; then routed paths per layer and width w, separated by ;. In a path a pad name is that pad's centre, name@x,y a point inside that pad or via, vN(x,y) a via of type N, cw(c..) or ccw(c..) an arc to the next point about the centre after c; other vN are vias at no path point)
1V8: R47.2 R54.1
3V3: C5.2 C15.1 C16.2 C20.1 C21.2 C23.2 FB1.2 P2.5 R6.1 R7.1 R8.1 R16.1 R18.1 R19.1 R20.1 R21.1 R22.1 R28.1 R33.1 R34.1 R35.1 R36.1 R37.1 R48.2 R49.2 U7.6 U9.2 U10.2 U13.5 | length 8901.4
  Top Layer w7.87: U7.6@481.75,2379.58 U7.6@481.94,2379.78 ; 1138,1153.97 1139,1152.97 1203.18,1152.97 1224.43,1174.22 1224.43,1282.51 1202.97,1303.97 U13.5@1141.19,1303.97 ; R7.1@1143.62,2184.7 R7.1@1156.6,2197.69 ; C5.2@1220.13,2474.63 C5.2@1224.63,2470.13 ; R16.1@1884.95,1623.67 R16.1@1886.95,1623.67
  Top Layer w9.84: U9.2@367.47,2746.92 369.92,2746.92 369.97,2746.97 561.97,2746.97 669.97,2638.97 v1(669.97,2533.97) 669.97,2529.4 v1@669.76,2529.19
  Top Layer w10: U7.6@481.94,2379.78 481.94,2411.08 521.31,2450.45 C15.1@713.66,2450.45 713.66,2485.29 v1@669.76,2529.19 ; R18.1@781.69,2322.49 823.49,2322.49 874.74,2373.74 874.74,2498.75 v1(905.17,2529.19) ; C5.2@1220.13,2474.63 v1(1220.13,2529.19)
  Top Layer w15: v1(905.17,2529.19) 905.17,2706.17 v1(958.97,2759.97)
  Top Layer w19.68: R20.1@260.93,2251.43 R21.1@260.93,2312.65 R22.1@260.93,2381.55 206.01,2381.55 178.51,2409.05 178.51,2492.51 217.47,2531.47 v1@667.47,2531.47 ; v1@669.97,2529.19 v1(905.17,2529.19) 906.42,2530.44 1218.88,2530.44 v1(1220.13,2529.19) ; R19.1@781.69,2253.6 R18.1@781.69,2322.49 ; R19.1@781.69,2253.6 781.7,2190.43 787.44,2184.7 R7.1@1143.62,2184.7 ; 832.97,1268.97 R49.2@832.97,1210.97 R48.2@832.97,1153.97 832.97,993.63 891.91,934.7 R36.1@959.75,934.7 ; R36.1@961.75,936.7 961.75,966.08 1018.87,1026.1 1109.75,1026.1 1290.97,1205.33 1874.7,1205.33 v1(1928.79,1151.23) ; R7.1@1156.6,2197.69 R8.1@1156.6,2258.91 ; R6.1@1746.26,2332.34 1747.76,2333.84 1747.76,2405.05 v1(1806.87,2405.05)
  Top Layer w31.5: v1@1218.88,2530.44 1225.42,2536.97 v1(1785.97,2536.97) ; R16.1@1884.95,1623.67 1843.36,1623.67 ccw(c1843.36,1523.68) 1743.36,1523.88 P2.5@1743.36,1338.24 v1@1929.58,1152.02 ; R16.1@1886.95,1623.67 1886.95,1788.53 1938.64,1840.21 v1(1938.64,1987.85) ; v1(1928.79,1151.23) 2046.9,1023.28 2086.51,983.67 cw(c2015.8,912.96) 2115.8,912.96 2115.8,708.32
  Bottom Layer w9.84: R34.1@961.98,2665.97 R34.1@963.98,2663.97
  Bottom Layer w15: v1(958.97,2759.97) 958.97,2728.2 R35.1@961.98,2725.2 R34.1@961.98,2665.97
  Bottom Layer w19.68: v1(1806.87,2405.05) 1821.37,2405.05 1889.44,2473.11 1889.44,2510.51 v1(1887.97,2511.97) ; R37.1@1928.79,707.42 2223.17,707.42 C20.1@2233.91,718.16 ; R28.1@1928.79,958.86 v1(1928.79,1151.23)
  Bottom Layer w31.5: v1(1785.97,2536.97) 1789.17,2533.77 1866.17,2533.77 v1(1887.97,2511.97) 1978.01,2421.94 1978.01,2133.23 1938.64,2093.86 v1(1938.64,1987.85)
5P0_RAW: D1.2 D4.2 Q1.1 R13.2 R29.1 U1.A9 U1.B9 | length 3410.2
  Top Layer w9.84: D1.2@2668.95,2350.05 D1.2@2671.3,2352.4
  Top Layer w20: 2668.95,2444 2697.04,2472.09 U1.A9@2820.97,2472.09 ; D1.2@2671.3,2352.4 U1.B9@2820.97,2352.4
  Top Layer w31.5: v1(462.26,2076.43) 464.43,2078.6 1910.6,2078.6 1955.97,2123.97 1955.97,2443.54 2035.41,2522.97 2589.97,2522.97 2668.95,2444 D1.2@2668.95,2350.05
  Bottom Layer w7.87: D4.2@1525.25,2102.02 D4.2@1550.84,2076.43
  Bottom Layer w19.68: v1(462.26,2076.43) R13.2@516.84,2076.43 ; Q1.1@1375.64,2044.93 1376.63,2045.92 1376.63,2120.19 R29.1@1377.61,2121.17 D4.2@1521.85,2121.17 ; D4.2@1531.69,2121.17 D4.2@1521.85,2121.17 ; D4.2@1544.94,2098.08 1533.12,2109.9 D4.2@1521.85,2121.17 ; D4.2@1550.84,2076.43 v1(1584.3,2076.43)
5VCC: C12.1 C13.1 C22.2 C32.2 C38.1@5795.97,364.95 L1.2 L4.1 P3.6 R1.1 T1.1 U2.2 U6.3 U11.8 U15.3 | length 6281.6
  Top Layer w9.84: U2.2@2191.97,2791.98 U2.2@2195.97,2787.98
  Top Layer w15.75: v1(1033.97,1754.97) 1033.97,1821.97 v1(1161.97,1949.97) ; v1(1038.97,2321.29) 1038.97,2233.97 v1(1050.97,2221.97)
  Top Layer w19.68: v1(1031.97,1499.97) 1036.23,1495.72 1426.82,1495.72 ccw(c1426.82,1594.15) 1525.25,1594.15 1525.25,1927.22 cw(c1625.25,1927.22) 1625.25,2027.22 2411.08,2027.22 v1(2440.6,1997.69)
  Top Layer w20: U2.2@2195.97,2787.98 2267.97,2787.98 2440.97,2614.97 v1(2440.97,2593.97)
  Top Layer w39.37: T1.1@2657.14,1918.95 2735.03,1918.95 cw(c2735.03,1818.95) 2835.03,1818.95 C32.2@2835.03,1811.97 2835.03,1748.8 L4.1@2834.97,1748.8
  Bottom Layer w9.84: C22.2@895.95,2586.98 C22.2@897.95,2586.98 ; v1(1031.97,1499.97) v1@1032.97,1500.97 ; v1@1032.97,1753.97 v1(1033.97,1754.97) ; v1@2440.6,2593.6 v1(2440.97,2593.97)
  Bottom Layer w15.75: U11.8@763.34,2564.98 824.98,2564.98 846.98,2586.98 C22.2@895.95,2586.98 ; C22.2@897.95,2586.98 936.67,2548.26 936.67,2542.28 936.67,2418.28 1033.66,2321.29 v1(1038.97,2321.29) ; v1@1032.97,1500.97 v1@1032.97,1753.97 ; v1(1050.97,2221.97) 1159.48,2113.47 1159.48,1952.47 v1(1161.97,1949.97)
  Bottom Layer w19.68: P3.6@361.97,225.97 361.97,240.97 cw(c435.62,240.97) 435.62,314.62 757.53,314.62 ccw(c757.53,410.19) 825.09,342.59 944.54,462.04 944.54,1412.54 v1(1031.97,1499.97)
  Bottom Layer w20: v1(2440.6,1997.69) v1@2440.6,2593.6
5VCC_D: C6.1 C31.1 C33.2 C37.1 L4.2 U3.3 U3.4 U12.3 U12.4 U14.3 U14.4 | length 2448.6
  Top Layer w9.84: v1@1508.97,1457.97 v1(1509.97,1458.97)
  Top Layer w20: U3.4@680.11,1556.11 778.24,1457.97 v1@1508.97,1457.97 ; v1(1810.97,1457.97) 2279.71,1457.97 U12.4@2330.84,1406.84
  Top Layer w39.37: U12.4@2330.84,1406.84 2330.84,1585.62 cw(c2430.84,1585.62) 2430.84,1685.62 C33.2@2766.95,1685.62 L4.2@2766.97,1748.8
  Bottom Layer w9.84: v1(1509.97,1458.97) v1@1510.47,1458.47 ; v1@1810.47,1458.47 v1(1810.97,1457.97)
  Bottom Layer w20: v1@1510.47,1458.47 v1@1810.47,1458.47
ADC_T: C8.2 R10.1 R14.2 T2.1 U5.4 | length 1395.9
  Top Layer w7.87: v1(1198.97,2009.97) 1198.97,1921.92 1204.95,1915.95 C8.2@1204.95,1800.84 ; R10.1@1206.31,1675.05 ccw(c1208.47,1675.05) R10.1@1208.47,1672.89 ; v1(1485.88,2420.92) 1491.21,2420.92 1501.05,2411.08 U5.4@1544.93,2411.08
  Top Layer w10: v1(1074.97,2332.97) 1074.97,2247.97 v1(1102.97,2219.97)
  Top Layer w19.68: C8.2@1204.95,1800.84 1204.93,1737.68 R10.1@1204.92,1676.44 cw(c1204.92,1675.06) R10.1@1206.31,1675.06 ; R10.1@1208.47,1672.89 T2.1@1348.08,1672.89
  Bottom Layer w10: v1(1074.97,2332.97) 1074.97,2384.03 1111.86,2420.92 v1(1485.88,2420.92) ; v1(1102.97,2219.97) 1198.97,2123.97 v1(1198.97,2009.97)
ADS1115_GND: C5.1 C7.2 C9.2 FB2.1 R11.2 R15.1 U5.3 | length 1415.7
  Top Layer w7.87: C9.2@1152.97,2338.95 C9.2@1155.95,2335.98 ; FB2.1@1152.97,2401.97 FB2.1@1156.58,2401.97 ; v1(1155.97,2491.97) 1155.97,2470.73 C5.1@1156.58,2470.13 ; U5.3@1544.93,2391.39 1584.3,2391.39 1623.67,2450.45 ; v1(1677.97,2490.97) 1678.97,2490.97 1691.41,2503.41 1786.85,2503.41 1834.43,2455.83 1834.43,2305.04 1792.83,2263.44 R11.2@1746.26,2263.44 ; 1623.68,2450.45 cw(c1671.2,2402.92) 1671.2,2470.13 ccw(c1671.2,2402.92) 1623.68,2450.45
  Top Layer w19.68: C9.2@1152.97,2338.95 FB2.1@1152.97,2401.97 ; FB2.1@1156.58,2401.97 C5.1@1156.58,2470.13 ; C7.2@1746.29,2184.7 R11.2@1746.26,2263.44
  Bottom Layer w7.87: v1(1155.97,2491.97) 1676.97,2491.97 v1(1677.97,2490.97)